# Altium PCB AutoPlantWatering.PcbDoc
Units mm, origin at the board's own origin, x right, y up, seen from the top; angles counter-clockwise.
Board outline 50 x 50 mm, 2 copper layers (Top Layer, Bottom Layer); 34 components, 23 nets, 107 pads, 0 vias.
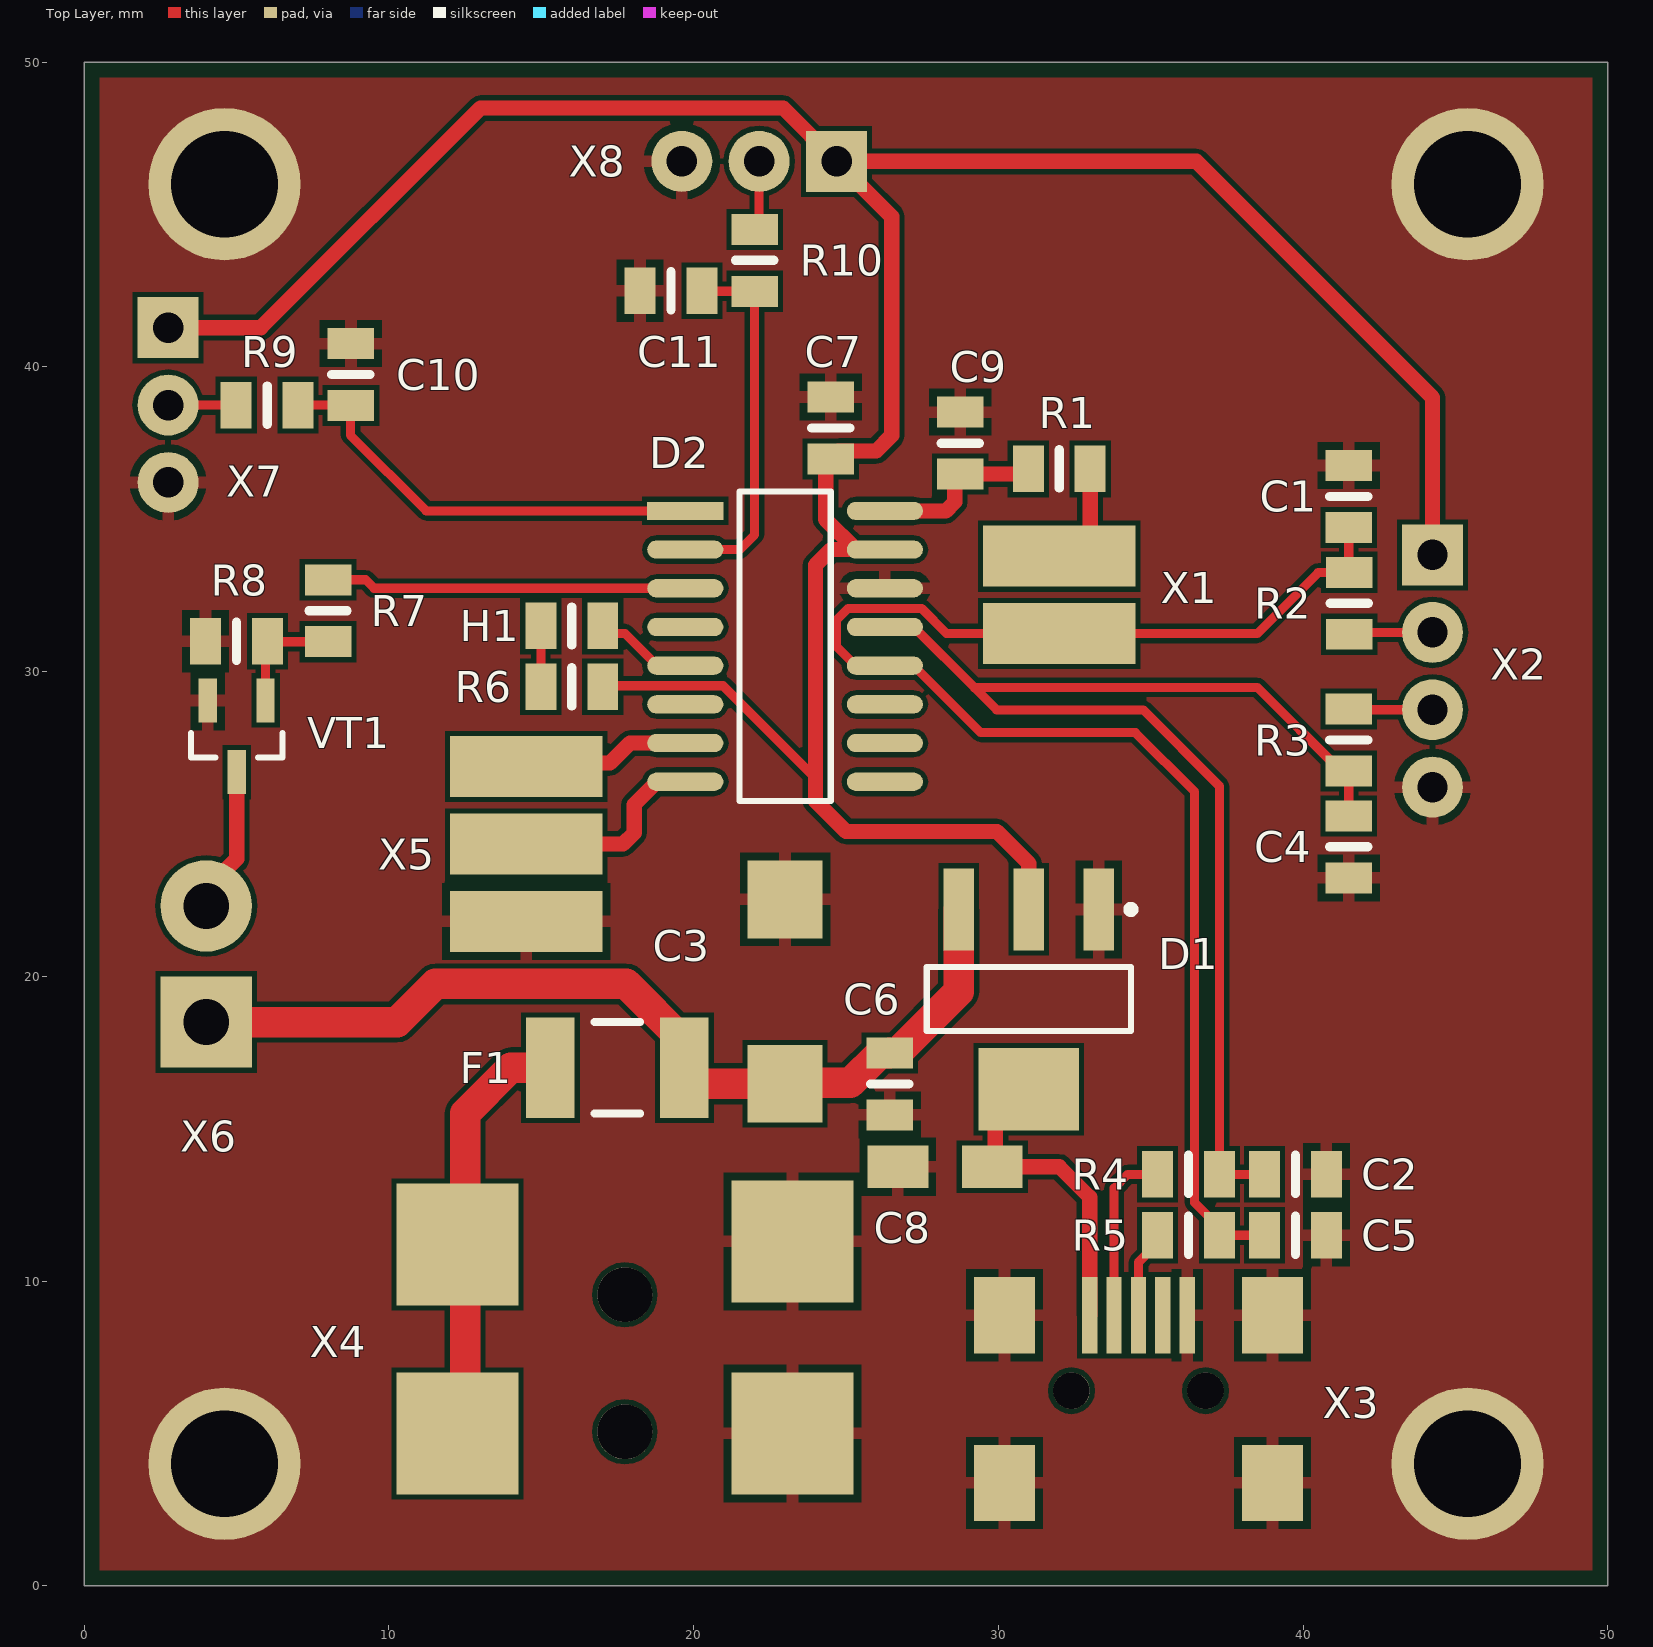
[diagram p0: Top Layer view]
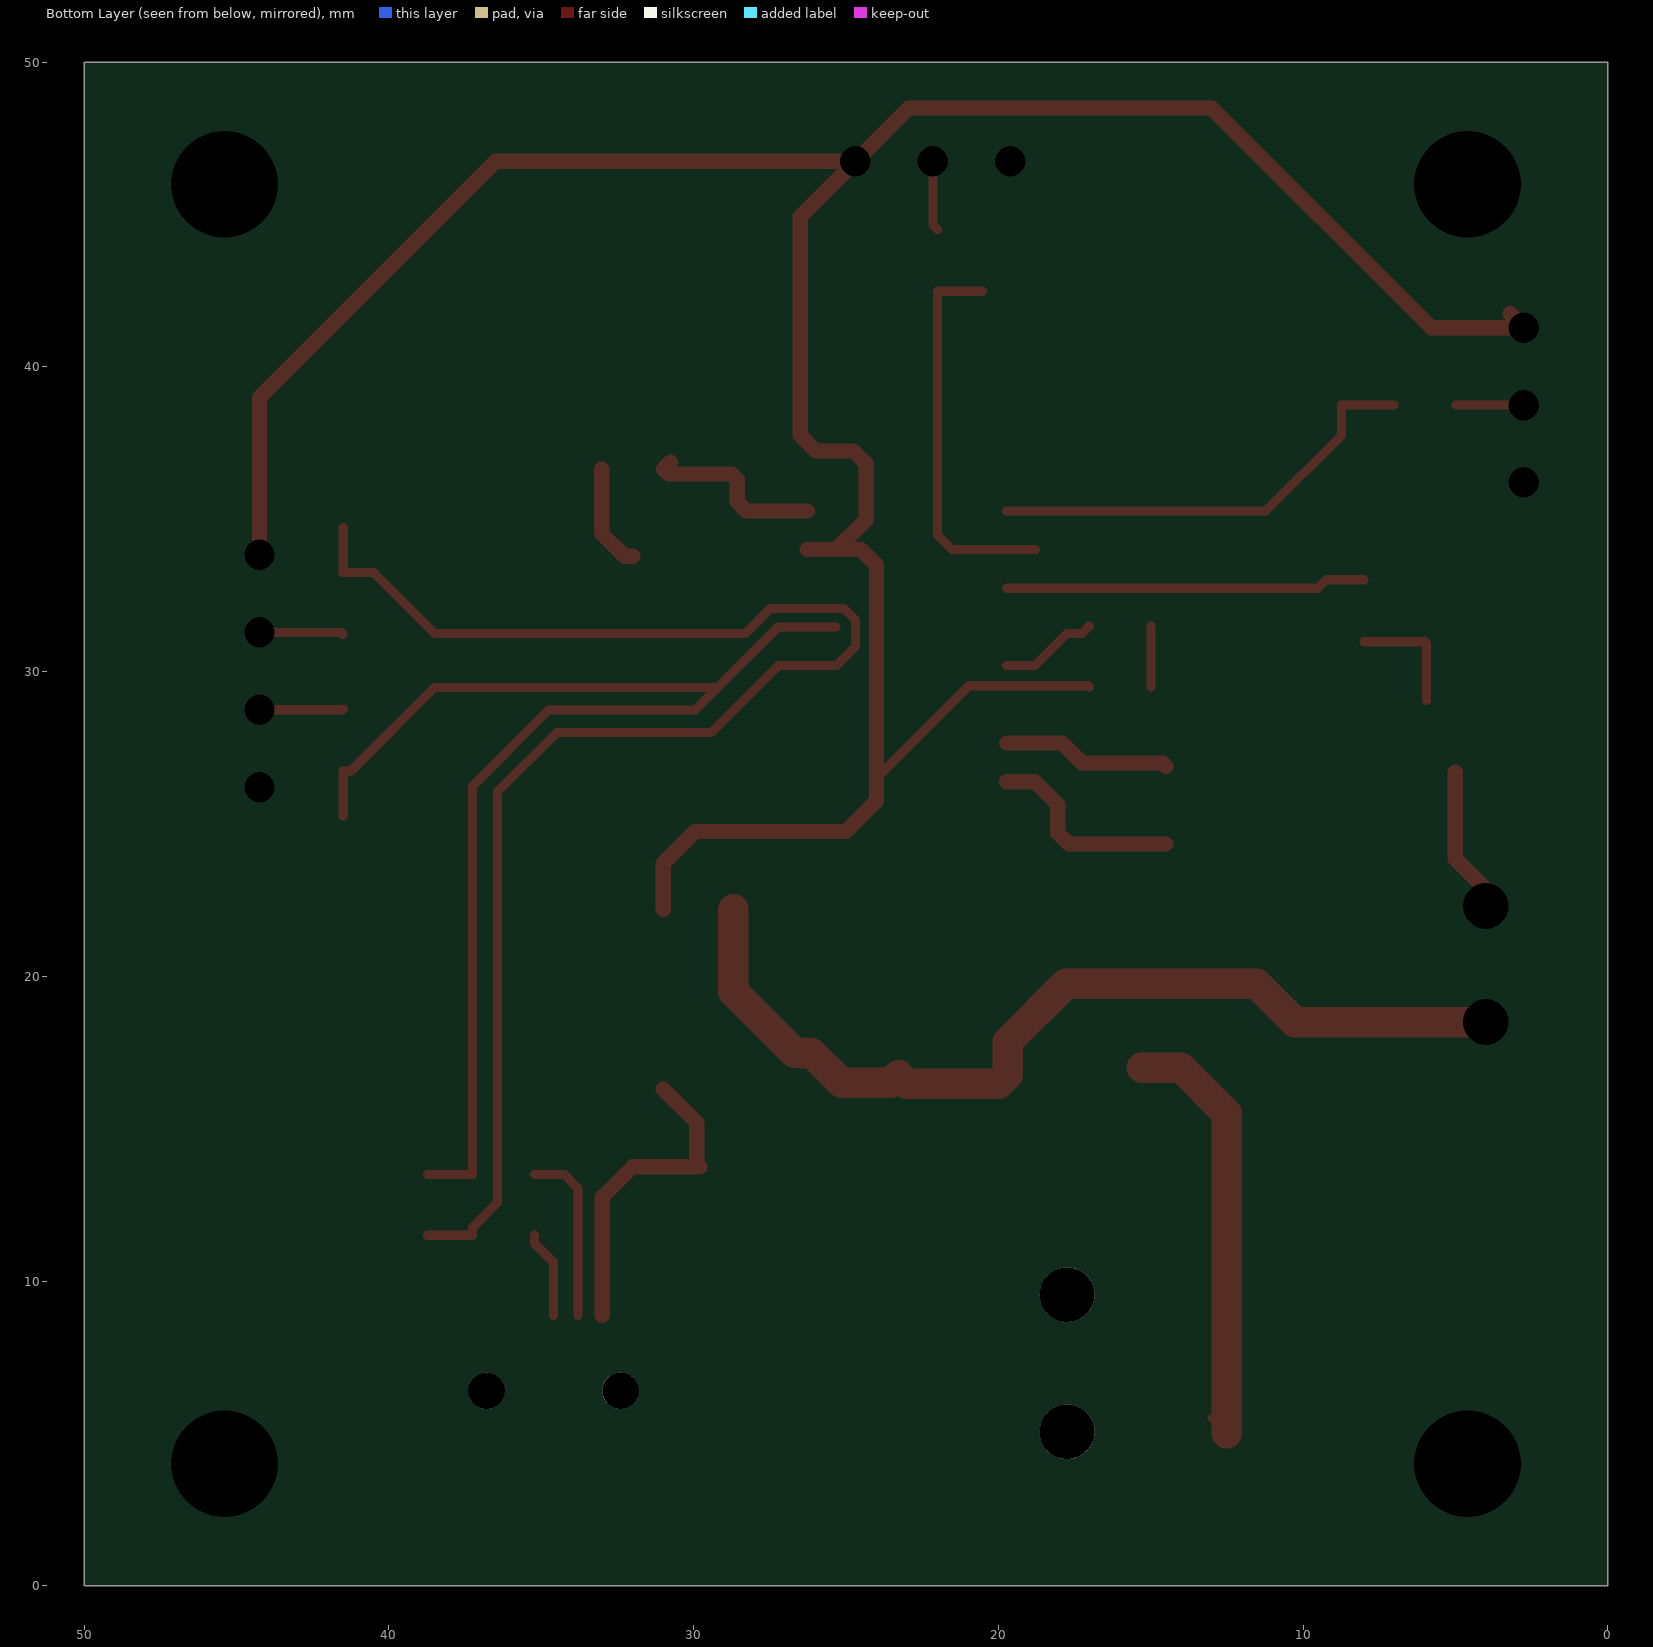
[diagram p1: Bottom Layer view, seen from below]

## Layer stack, top to bottom
Top Solder: solder mask 0.0102, Solder Resist, Dk 3.5
Top Layer: signal copper 0.0356
Dielectric 1: dielectric 0.32, FR-4, Dk 4.8
Bottom Layer: signal copper 0.0356
Bottom Solder: solder mask 0.0102, Solder Resist, Dk 3.5

## Board outline
0,0 50,0 50,50 0,50

## Design rules (kind name [scope] priority, off if disabled: settings)
Clearance [All] p1: gap=0.16 ignorepadtopadclearanceinfootprint=FALSE except(0: Arc-Hole Track-Hole SMDPad-Hole THPad-Hole Via-Hole Fill-Hole Poly-Hole Region-Hole Text-Hole)
HoleSize [All] p1: absolutevalues=TRUE maxlimit=4 minlimit=0.025 maxpercent=80.000 minpercent=20.000
PolygonConnect [All] p1: connectstyle=Relief reliefconductorwidth=0.4 reliefentries=4 polygonreliefangle="90 Angle" airgapwidth=0.254
RoomDefinition AutoPlantWatering [InComponentClass('AutoPlantWatering')] p1: confinementstyle=ConfineIn formatcopy=TRUE lockcomponents=FALSE outline 50,0 0.1,0 0.1,50 50,50
RoutingVias [All] p1: holewidth=0.711 width=1.27 viastyle="Through Hole" minholewidth=0.711 minwidth=1.27 maxholewidth=0.711 maxwidth=1.27
SolderMaskExpansion [All] p1: expansion=0.102 istentingtop=FALSE
Width [All] p1: maxlimit=1.5 minlimit=0.254 preferedwidth=0.254
29 further rules are at their usual default settings.

## Components (designator, comment, footprint, x,y, rotation, side; value= is the part's Value field where it differs from the comment)
C1 "0805-50 V-COG-47pF±5 %" SMD-0805C 41.5,35.75 r0 top value="47 pF"
C2 "0805-50 V-COG-47pF±5 %" SMD-0805C 39.75,13.5 r270 top value="47 pF"
C3 "D-20 V-47uF±10 %" "CAP POL 2917/7343" 23,19.5 r90 top value="47 uF"
C4 "0805-50 V-COG-47pF±5 %" SMD-0805C 41.5,24.25 r180 top value="47 pF"
C5 "0805-50 V-COG-47pF±5 %" SMD-0805C 39.75,11.5 r270 top value="47 pF"
C6 "0805-25 V-X5R-10uF±10 %" SMD-0805C 26.432,16.47 r180 top value="10 uF"
C7 "0805-16 V-X7R-0.1uF±10 %" SMD-0805C 24.5,38 r0 top value="0.1 uF"
C8 "A-10 V-22uF±10 %" CAP_TAN_CASE_A 28.25,13.75 r180 top value="22 uF"
C9 "0805-16 V-X7R-0.1uF±10 %" SMD-0805C 28.75,37.5 r0 top value="0.1 uF"
C10 "0805-16 V-X7R-0.1uF±10 %" SMD-0805C 8.75,39.75 r0 top value="0.1 uF"
C11 "0805-16 V-X7R-0.1uF±10 %" SMD-0805C 19.257,42.5 r90 top value="0.1 uF"
D1 "AMS1117-5.0" SOT223_M 31,19.246 r270 top
D2 "CH552G" "SO-16 _150mil" 23,30.777 r0 top
F1 "MF-MSMF050" SMD-1812-FUSE 17.494,17 r0 top
H1 "GNL-0805GC" SMD-0805LED 16,31.5 r90 top
R1 "0805±5 %-10 kOhm" SMD-0805-RES 32,36.655 r270 top value="10 kOhm"
R2 "0805±5 %-22 Ohm" SMD-0805-RES 41.519,32.245 r180 top value="22 Ohm"
R3 "0805±5 %-22 Ohm" SMD-0805-RES 41.5,27.755 r0 top value="22 Ohm"
R4 "0805±5 %-22 Ohm" SMD-0805-RES 36.245,13.5 r90 top value="22 Ohm"
R5 "0805±5 %-22 Ohm" SMD-0805-RES 36.245,11.5 r90 top value="22 Ohm"
R6 "0805±5 %-1 kOhm" SMD-0805-RES 16,29.5 r90 top value="1 kOhm"
R7 "0805±5 %-100 Ohm" SMD-0805-RES 8,32 r0 top value="100 Ohm"
R8 "0805±5 %-10 kOhm" SMD-0805-RES 4.995,31 r90 top value="10 kOhm"
R9 "0805±5 %-200 Ohm" SMD-0805-RES 6,38.75 r270 top value="200 Ohm"
R10 "0805±5 %-200 Ohm" SMD-0805-RES 22,43.5 r180 top value="200 Ohm"
VT1 "MMBF170LT1G" SOT23_3 5,27.881 r270 top
X1 "DS1022-11*2RD61" PLS-2_D1 32,33.79 r270 top
X2 "DS1021-1*4S61" PLS-4 44.25,33.83 r270 top
X3 "DS1104-B60SRS" Mini-USB-B_HOLE 34.6,5 r0 top
X4 "DC-005-5A-2.5-SMT" PJ_2.5MM_SMT_HOLE 17.743,8.15 r0 top
X5 "DS1022-11*3RD61" PLS-3_D1 14.5,26.885 r270 top
X6 "KLS2-125-3.81-02P-4S" TERM_BLOCK_2 4,22.31 r270 top
X7 "DS1021-1*3S61" PLS-3#1 2.75,41.29 r270 top
X8 "DS1021-1*3S61" PLS-3#2 24.69,46.75 r180 top

## Footprints (in the part's own frame and the unit in brackets; to place one, negate y for a bottom-side part, rotate by r counter-clockwise, add the part's x,y. Pads: shape width x height; smd on the part's side, far side on the other; paste and mask are expansions set on the pad)
"CAP POL 2917/7343" [mm] "Molded Capacitor, 2-Leads, Body 7.30x4.30mm, IPC Medium Density"
  rect 2.55x2.45 smd: 1(-3.025,0) 2(3.025,0)
  body extent -3.65,-2.15 3.65,2.15, height 4.1
CAP_TAN_CASE_A [mm] "Tantalum capacitor with case A"
  rect 2x1.4 smd: 1(-1.55,0) 2(1.55,0)
  body extent -1.65,-0.84 1.75,0.84, height 1.71
Mini-USB-B_HOLE [mm] "Mini USB 2.0 Type B SMT Horizontal 5 Contacts"
  rect 0.5x2.5 smd mask+0.15: 1(-1.6,3.875) 2(-0.8,3.875) 3(0,3.875) 4(0.8,3.875) 5(1.6,3.875)
  rect 2x2.5 smd: Shell(-4.4,-1.625) Shell(-4.4,3.875) Shell(4.4,-1.625) Shell(4.4,3.875)
  round 1.2 hole 1.2 unplated mask+0: ""(-2.2,1.4) ""(2.2,1.4)
  body extent -4.8,-4.52 4.8,4.73, height 3.92
PJ_2.5MM_SMT_HOLE [mm] "Power jack 2.5mm SMT"
  rect 4x4 smd: 1(-5.5,-3.15) 1(-5.5,3.05) 2(5.5,-3.15) 2(5.5,3.15)
  round 1.8 hole 1.8 unplated mask+0: ""(0,-3.1) ""(0,1.4)
  body extent -6.25,-8.1 6.25,6.6, height 11
PLS-2_D1 [mm] "Connector; Header; 2 Position"
  rect 2x5 smd: 1(0,0) 2(2.54,0)
  body extent -1.3,-2.7 3.77,2.8, height 10.44
PLS-3#1 [mm] "Connector; Header; 3 Position"
  rect 2x2 / inner rect 2x2 / far side rect 0x0 hole 1 unplated mask+0.102: 1(0,0)
  round 2 / inner round 2 / far side round 0 hole 1 unplated: 2(2.54,0) 3(5.08,0)
  body extent -1.24,-1.27 6.38,1.27, height 8.54
PLS-3#2 [mm] "Connector; Header; 3 Position"
  rect 2x2 / inner rect 2x2 / far side rect 0x0 hole 1 unplated: 1(0,0)
  round 2 / inner round 2 / far side round 0 hole 1 unplated: 2(2.54,0) 3(5.08,0)
  body extent -1.24,-1.27 6.38,1.27, height 8.54
PLS-3_D1 [mm] "Connector; Header; 3 Position"
  rect 2x5 smd: 1(0,0) 2(2.54,0) 3(5.08,0)
  body extent -1.3,-2.75 6.4,2.8, height 10.44
PLS-4 [mm] "Connector; Header; 4 Position"
  rect 2x2 / inner rect 2x2 / far side rect 0x0 hole 1 unplated: 1(0,0)
  round 2 / inner round 2 / far side round 0 hole 1 unplated: 2(2.54,0) 3(5.08,0) 4(7.62,0)
  body extent -1.27,-1.27 8.89,1.27, height 9.5
SMD-0805-RES [mil]
  rect 60x40 smd: 1(0,40) 2(0,-40)
  silkscreen extent -25,0 25,0, body extent -24,-39 26,39, height 31
SMD-0805C [mil]
  rect 60x40 smd: 1(0,40) 2(0,-40)
  silkscreen extent -25,0 25,0, body extent -25,-39 25,39, height 35
SMD-0805LED [mil]
  rect 60x40 smd: 1(0,40) 2(0,-40)
  silkscreen extent -25,0 25,0, body extent -25,-40 25,40, height 43
SMD-1812-FUSE [mm] "1812 SMD Fuse"
  rect 1.6x3.3 smd: 1(-2.2,0) 2(2.2,0)
  silkscreen extent -0.75,-1.5 0.75,1.5, body extent -2.36,-1.7 2.37,1.71, height 1.34
"SO-16 _150mil" [mm]
  rect 2.5x0.6 smd: 1(-3.275,4.5)
  oval 2.5x0.6 smd: 2(-3.275,3.23) 3(-3.275,1.96) 4(-3.275,0.69) 5(-3.275,-0.58) 6(-3.275,-1.85) 7(-3.275,-3.12) 8(-3.275,-4.39) 9(3.275,-4.39) 10(3.275,-3.12) 11(3.275,-1.85) 12(3.275,-0.58) 13(3.275,0.69) 14(3.275,1.96) 15(3.275,3.23) 16(3.275,4.5)
  silkscreen extent -1.5,-5.02 1.5,5.14, body extent -3.12,-4.94 3.12,5.04
SOT23_3 [mm] "SOT23, 3-Leads, Body 2.9x1.3mm, Pitch 0.95mm, Lead Span 2.3mm - Reverse Pinning, IPC Low Density"
  rect 1.45x0.6 smd: 1(-1.175,0.95) 2(-1.175,-0.95) 3(1.175,0)
  silkscreen extent -0.1,-1.5 0.7,1.5, body extent -1.25,-1.5 1.25,1.5, height 1.1
SOT223_M [mm] "SOT223, 4-Leads, Body 6.5x3.5mm, Pitch 2.3mm, Lead Span 7mm, IPC Low Density"
  rect 2.7x1 smd: 1(-2.95,2.3) 2(-2.95,0) 3(-2.95,-2.3)
  rect 2.7x3.3 smd: 2(2.95,0)
  silkscreen extent -3.07,-3.35 1.05,3.48, body extent -3.55,-3.25 3.41,3.25, height 1.65
TERM_BLOCK_2 [mm] "Terminal block connector; 2 position"
  rect 3x3 / inner rect 3x3 / far side rect 0x0 hole 1.5 unplated: 1(3.81,0)
  round 3 / inner round 3 / far side round 0 hole 1.5 unplated: 2(0,0)
  body extent -2.4,-3.5 6.22,3.5, height 8.4

## Part data
C1 C2 C4 C5 C6 C7 C9 C10 C11: library part Cap, "Capacitor", ComponentLink1Description=Datasheet
C3 C8: library part Cap_el, "Electrolytic capacitor", ComponentLink1Description=Datasheet
D1: library part LM317, "3-Terminal Fixed Regulator", Manufacturer="Advanced Monolithic Systems", ComponentLink1Description=Datasheet
D2: library part CH55xG, "8-bit USB microcontroller", Manufacturer=WCH
F1: library part Mulrifuse, "Multifuse", Manufacturer=Bourns, ComponentLink1Description=Datasheet
H1: library part LED, "Typical INFRARED GaAs LED", Manufacturer="G-NOR ELECTRONICS", ComponentLink1Description=Datasheet
R1 R2 R3 R4 R5 R6 R7 R8 R9 R10: library part Res, "Resistor", ComponentLink1Description=Datasheet
VT1: library part Transistor_N, "N-channel FET", Manufacturer="ON Semiconductor"
X1: library part PLS-2, "Connector PLS-2", Manufacturer="Connfly Electronic", ComponentLink1Description=Datasheet
X2: library part PLS-4, "PLS-4 connector", Manufacturer="Connfly Electronic", ComponentLink1Description=Datasheet
X3: library part MINI-USB-B, "Mini USB-B connector", Manufacturer="Connfly Electronics", ComponentLink1Description=Datasheet
X4: library part Power_Jack_SMT_2.5mm, "Power jack 2.5 mm SMT connector", Manufacturer="XKB Connectivity"
X5: library part PLS-3, "PLS SMD connector", Manufacturer="Connfly Electronics", ComponentLink1Description=Datasheet
X6: library part TERM_BLOCK_2, "Terminal block connector; 2 position", Manufacturer=KLS, ComponentLink1Description=Datasheet
X7 X8: library part PLS-3, "PLS connector", Manufacturer="Connfly Electronics", ComponentLink1Description=Datasheet

## Free pads (board coordinates)
  round 5 / inner round 5 / far side round 0 hole 3.5 unplated mask+0: 1(45.4,46) 2(45.4,4) 3(4.6,4) 4(4.6,46)

## Nets (pads, with @x,y where several pads share a name; then routed paths per layer and width w, separated by ;. In a path a pad name is that pad's centre, name@x,y a point inside that pad or via, vN(x,y) a via of type N, cw(c..) or ccw(c..) an arc to the next point about the centre after c; other vN are vias at no path point)
3V3: C9.2 D2.16 R1.2 | length 6
  Top Layer w0.5: D2.16 28.277,35.277 28.569,35.569 28.569,36.303 C9.2 30.813,36.484 R1.2 R1.2@30.763,36.875
5V: C7.2 C8.1 D1.2 D2.15 R6.2 X2.1 X3.1 X7.1 X8.1 | length 108.1
  Top Layer w0.3: R6.2 17.053,29.537 20.963,29.537 24,26.5
  Top Layer w0.5: X7.1@3.21,41.75 X7.1 5.79,41.29 13,48.5 22.94,48.5 X8.1 ; D2.15 D2.15@25.325,34.007 ; D1.2@31,16.296 29.9,15.196 29.9,13.85 C8.1 32,13.75 33,12.75 X3.1 ; D1.2@31,22.196 31,23.707 29.957,24.75 25,24.75 24,25.75 24,26.5 24,33.5 24.507,34.007 D2.15@25.325,34.007 ; X2.1 44.25,39 36.5,46.75 X8.1 ; X8.1 26.5,44.94 26.5,37.75 25.992,37.242 24.758,37.242 C7.2 24.332,36.816 24.332,35 D2.15@25.325,34.007
12V: C3.1 C6.2 D1.3 F1.2 X6.1 | length 31.4
  Top Layer w1: X6.1 10.272,18.5 11.522,19.75 17.794,19.75 19.694,17.85 F1.2 19.694,16.775 19.994,16.475 C3.1 23.275,16.75 23.525,16.5 25.142,16.5 26.12,17.478 26.424,17.478 C6.2 26.686,17.486 28.7,19.5 D1.3
AIN1: C10.2 D2.1 R9.1 | length 14.7
  Top Layer w0.3: R9.1 8.734,38.75 8.734,37.766 11.223,35.277 D2.1
AIN2: C11.2 D2.2 R10.1 | length 12.9
  Top Layer w0.3: D2.2@18.775,34.007 D2.2 21.507,34.007 22,34.5 R10.1 20.532,42.484 C11.2@20.516,42.5
GND: C1.1 C2.1 C3.2 C4.1 C5.1 C6.1 C7.1 C8.2 C9.1 C10.1 C11.1 D1.1 D2.14 pad.1 pad.2 pad.3 pad.4 R8.1 VT1.2 X2.4 X3.5 X3.Shell X4.2 X5.3 X7.3 X8.3
NetD2_5: D2.5 H1.2 | length 3.2
  Top Layer w0.3: H1.2 17.266,31.25 17.75,31.25 18.803,30.197 D2.5
NetD2_7: D2.7 X5.1 | length 5.5
  Top Layer w0.5: X5.1 14.615,27 17.25,27 17.907,27.657 D2.7
NetD2_8: D2.8 X5.2 | length 6.6
  Top Layer w0.5: X5.2 17.684,24.345 18.049,24.71 18.049,25.633 18.802,26.387 D2.8
NetF1_1: F1.1 X4.1 | length 14.6
  Top Layer w0.254: X4.1@12.5,5 X4.1@13,5.5
  Top Layer w1: X4.1@12.5,5 12.5,11.2 12.5,15.5 14,17 F1.1
NetH1_1: H1.1 R6.1 | length 2
  Top Layer w0.3: R6.1 H1.1
NetR1_1: R1.1 X1.1 | length 3.4
  Top Layer w0.5: X1.1 32.266,33.79 33.016,34.54 R1.1
NetR2_1: R2.1 X2.2 | length 2.8
  Top Layer w0.3: R2.1 41.58,31.29 X2.2
NetR3_1: R3.1 X2.3 | length 2.8
  Top Layer w0.3: R3.1 41.521,28.75 X2.3
NetR4_1: R4.1 X3.2 | length 5.8
  Top Layer w0.3: X3.2 33.8,13.05 34.25,13.5 R4.1
NetR5_1: R5.1 X3.3 | length 2.9
  Top Layer w0.3: X3.3 34.6,10.617 35.229,11.246 R5.1
NetR7_2: R7.2 R8.2 VT1.1 | length 4
  Top Layer w0.3: VT1.1 5.95,30.939 R8.2 6.027,30.984 R7.2
NetR9_2: R9.2 X7.2 | length 2.2
  Top Layer w0.3: X7.2 R9.2
NetR10_2: R10.2 X8.2 | length 2.4
  Top Layer w0.3: R10.2 22.15,44.666 X8.2 X8.2@22.096,46.696
NetVT1_3: VT1.3 X6.2 | length 4.8
  Top Layer w0.5: X6.2 4,22.851 5,23.851 VT1.3
PUMP_EN: D2.3 R7.1 | length 11.8
  Top Layer w0.3: R7.1 9.234,33.016 9.513,32.737 D2.3
USB+: C1.2 C5.2 D2.12 R2.2 R5.2 X1.2 | length 50.6
  Top Layer w0.3: C5.2 R5.2 37.261,11.754 36.443,12.572 36.443,26.057 34.5,28 29.422,28 27.225,30.197 D2.12 25.325,30.197 24.684,30.837 24.684,31.688 25.072,32.077 27.478,32.077 28.304,31.25 X1.2 38.5,31.25 40.5,33.25 41.508,33.25 R2.2 41.5,33.279 C1.2
USB-: C2.2 C4.2 D2.13 R3.2 R4.2 | length 43.2
  Top Layer w0.3: D2.13@25.325,31.467 D2.13 27.225,31.467 29.221,29.471 ; C2.2 R4.2 37.261,26.239 34.755,28.745 29.947,28.745 29.221,29.471 ; C4.2 R3.2 41.246,26.739 38.5,29.485 29.235,29.485 29.221,29.471
pads on no net: D2.4 D2.6 D2.9 D2.10 D2.11 X3. X3.4 X4.

## Polygon pours and split planes (outlines as drawn)
GND on Top Layer "GND_L01_P000" (solid, remove dead copper, pour order 0): 0.5,49.5 0.5,0.5 49.5,0.5 49.5,49.5